# EAGLE board adaptador_scart_v2 (EAGLE 7.3.0)
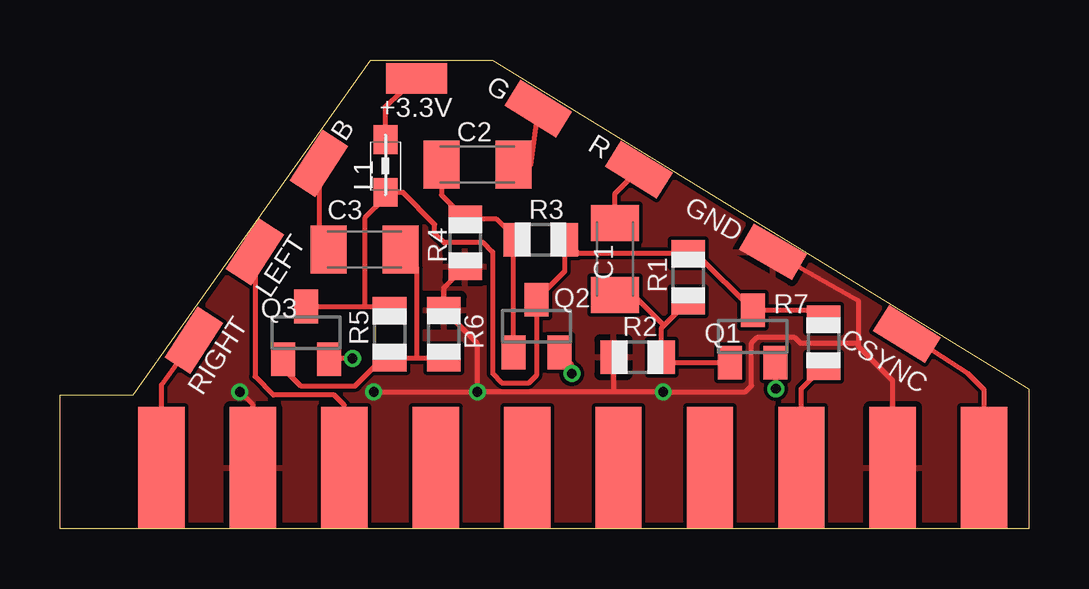
[diagram p0: board, top side]
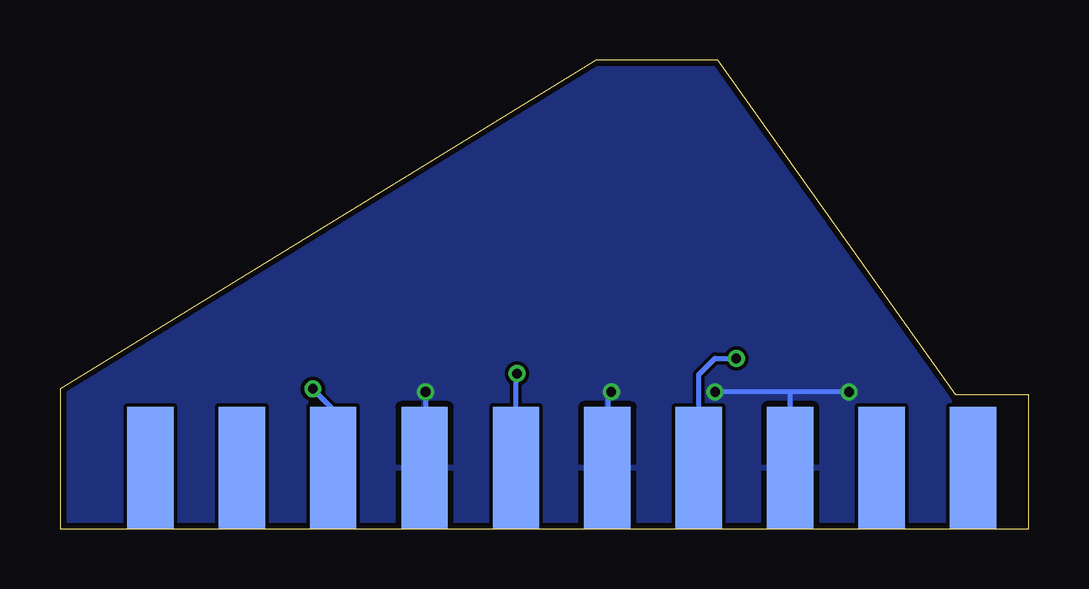
[diagram p1: board, bottom side, seen from below]

Size 40.39 x 19.56 mm. Coordinates in mm from the lower left corner, seen from the top.
Outline: 0,0 0,5.59 3.05,5.59 12.95,19.56 18.03,19.56 40.39,5.84 40.39,0 0,0
Copper layers (1*16): Top 0.035mm / dielectric 1.5mm / Bottom 0.035mm
Design rules "seedstudio_Fusion_eagle_rule_v1.1": minimum track width 6mil, minimum drill 12mil, track to track 6mil, track to pad 6mil, pad to pad 6mil, via to via 6mil, smd to smd 0mil, copper to edge 10mil, drill to drill 10mil, minimum pad ring 10mil, minimum via ring 6mil, stop-mask expansion 2mil, vias tented up to drill 100mil, thermal gap 10mil

## Footprints (pad centres in the part's own frame; a part is rotated, then mirrored left to right if it is on the bottom)
SMD1,27-2,54 = smd 1.27 x 2.54: 1 0,0
C1206K = smd 1.5 x 2: 1 -1.5,0; 2 1.5,0
0805 = smd 1.2 x 1: 1 -1.1,0; 2 1.1,0
SOT23 = smd 1 x 1.4: 1 -0.95,-1.1; 2 0.95,-1.1; 3 0,1.1
R0805 = smd 1.1 x 1.4: 1 -1,0; 2 1,0
SCART-PCB = smd 1.93 x 5.08: 1 17.145,0; 3 13.335,0; 5 9.525,0; 7 5.715,0; 9 1.905,0; 11 -1.905,0; 13 -5.715,0; 15 -9.525,0; 17 -13.335,0; 19 -17.145,0 | smd 1.93 x 5.08 bottom: 2 15.24,0; 4 11.43,0; 6 7.62,0; 8 3.81,0; 10 0,0; 12 -3.81,0; 14 -7.62,0; 16 -11.43,0; 18 -15.24,0; 20 -19.05,0

## Placement (x,y rotation side)
+3.3V  [SMD1,27-2,54]  14.86,18.8 90 top
B  [SMD1,27-2,54]  10.79,15.24 147 top
C1  1uF  [C1206K]  23.14,11.25 270 top
C2  1uF  [C1206K]  17.4,15.19 180 top
C3  1uF  [C1206K]  12.7,11.66 0 top
CSYNC  [SMD1,27-2,54]  35.31,8.13 58 top
G  [SMD1,27-2,54]  19.94,17.53 58 top
GND  [SMD1,27-2,54]  29.72,11.56 60 top
L1  [0805]  13.56,15.14 270 top
LEFT  [SMD1,27-2,54]  8.13,11.56 147 top
Q1  2N3904  [SOT23]  28.88,8.03 0 top
Q2  2N3904  [SOT23]  19.86,8.46 0 top
Q3  2N3904  [SOT23]  10.26,8.18 0 top
R  [SMD1,27-2,54]  24.13,14.99 58 top
R1  10K  [R0805]  26.19,10.49 90 top
R2  22K  [R0805]  24.08,7.16 0 top
R3  10K  [R0805]  20.04,12.06 0 top
R4  22K  [R0805]  16.89,11.94 90 top
R5  10K  [R0805]  13.74,8.13 90 top
R6  22K  [R0805]  16,8.13 270 top
R7  50  [R0805]  31.83,7.77 90 top
RIGHT  [SMD1,27-2,54]  5.59,7.87 147 top
U$1  SCART-MALE-PCB  [SCART-PCB]  19.47,2.54 0 bottom

## Library data of the parts
+3.3V B CSYNC G GND LEFT R RIGHT = wirepad
C1-C3 = rcl
L1 = wuerth-elektronik
Q1-Q3 = transistor-npn
R1-R7 = adafruit
U$1 = con-hirschmann

## Nets
BIN: B.1 C3.1
BOUT: Q3.2 U$1.7
CSYNC: CSYNC.1 U$1.20
FS: R7.1 U$1.16
GIN: C2.1 G.1
GND: GND.1 R2.1 R4.1 R6.1 U$1.4 U$1.5 U$1.9 U$1.13 U$1.18
GOUT: Q2.2 U$1.11
LEFT: LEFT.1 U$1.6
N$4: C1.2 Q1.1 R1.1 R2.2
N$8: C3.2 Q3.1 R5.1 R6.2
N$11: C2.2 Q2.1 R3.1 R4.2
RIGHT: RIGHT.1 U$1.2
RIN: C1.1 R.1
ROUT: Q1.2 U$1.15
VCC: L1.2 Q1.3 Q2.3 Q3.3 R1.2 R3.2 R5.2 R7.2
VCCIN: +3.3V.1 L1.1

## Tracks (layer width: path | path; a pad name or v marks a point on that pad's centre or on a via)
BIN
  Top 0.203: B.1 10.79,12.06 C3.1
BOUT  (via drill 0.4)
  Top 0.203: v12.19,7.11 11.24,7.11 Q3.2
  Bottom 0.203: U$1.7 13.76,6.43 13.08,7.11 v12.19,7.11
CSYNC
  Top 0.203: U$1.20 38.52,5.8 37.85,6.48 CSYNC.1
FS
  Top 0.203: U$1.16 30.9,5.85 R7.1
GIN
  Top 0.203: C2.1 19.63,15.19 G.1
GND  (via drill 0.4)
  Top 0.203: GND.1 33.27,9.53 33.27,7.75 | 33.27,7.75 33.27,7.62 34.71,6.18 U$1.18 | 33.27,7.75 30.86,7.75 30.61,8 29.08,8 28.83,7.75 28.83,5.97 28.57,5.71 v25.15,5.71 23.11,5.71 | 23.11,5.71 v17.4,5.71 | U$1.4 8.04,5.17 v7.49,5.71 | v13.08,5.71 v17.4,5.71 | R2.1 23.08,5.75 23.11,5.71 | v17.4,5.71 17.4,7.73 R6.1 16,10.05 R4.1
  Bottom 0.203: U$1.9 17.53,2.58 17.53,5.59 v17.4,5.71 | v25.15,5.71 25.15,2.58 U$1.13 | v7.49,5.71 10.03,5.71 | 10.03,5.71 v13.08,5.71 | U$1.5 9.95,5.63 10.03,5.71
  pour Bottom: 0,0 0,5.59 3.05,5.59 12.95,19.56 18.03,19.56 40.39,5.84 40.39,0
  pour Top: 0,0 40.39,0 40.39,5.84 18.03,19.56 12.95,19.56 3.05,5.59 0,5.59
GOUT  (via drill 0.4)
  Top 0.203: v21.34,6.48 21.34,6.83 Q2.2
  Bottom 0.203: U$1.11 21.38,6.43 v21.34,6.48
LEFT
  Top 0.203: LEFT.1 8.13,6.35 8.89,5.59 11.43,5.59 11.85,5.17 U$1.6
N$4
  Top 0.203: 25.18,8.48 25.08,8.38 R2.2 25.32,6.93 Q1.1 | 25.18,8.48 R1.1 | C1.2 23.9,9.75 25.18,8.48
N$8
  Top 0.203: Q3.1 9.31,6.69 10.03,5.97 12.33,5.97 12.33,5.98 13.48,7.13 R5.1 14.86,7.13 | 14.86,7.13 R6.2 | C3.2 14.2,11.58 14.86,10.92 14.86,7.13
N$11
  Top 0.203: Q2.1 18.91,11.94 R3.1 18.17,12.94 R4.2 15.9,13.93 C2.2
RIGHT
  Top 0.203: U$1.2 4.23,6.01 RIGHT.1
RIN
  Top 0.203: C1.1 23.14,13.99 R.1
ROUT  (via drill 0.4)
  Top 0.203: v29.84,5.84 29.84,6.91 Q1.2
  Bottom 0.203: U$1.15 29,5 v29.84,5.84
VCC
  Top 0.203: Q3.3 12.7,9.28 | 12.7,9.28 13.72,9.28 R5.2 | 12.7,9.28 12.7,12.95 13.56,13.82 L1.2 14.28,14.04 15.62,12.7 15.62,12.32 16,11.94 17.65,11.94 18.03,11.56 18.03,6.48 18.41,6.1 19.56,6.1 19.86,6.4 Q2.3 21.04,10.74 R3.2 21.61,11.49 R1.2 26.52,11.49 Q1.3 31.47,9.13 R7.2
VCCIN
  Top 0.203: L1.1 13.56,17.63 +3.3V.1

## Text on the board
201bmp: C:/Users/rodriguj/Documents/zxspectrum/zxuno/repositorio/hardware/otros/zxuno2scart/silueta.bmp